# Altium PCB ACSR-RC-V2.0.PcbDoc (part 3 of 3)
Units mm, origin at the board's own origin, x right, y up, seen from the top; angles counter-clockwise.
Board outline 93 x 128 mm, 2 copper layers (Top Layer, Bottom Layer); 207 components, 178 nets, 884 pads, 664 vias.
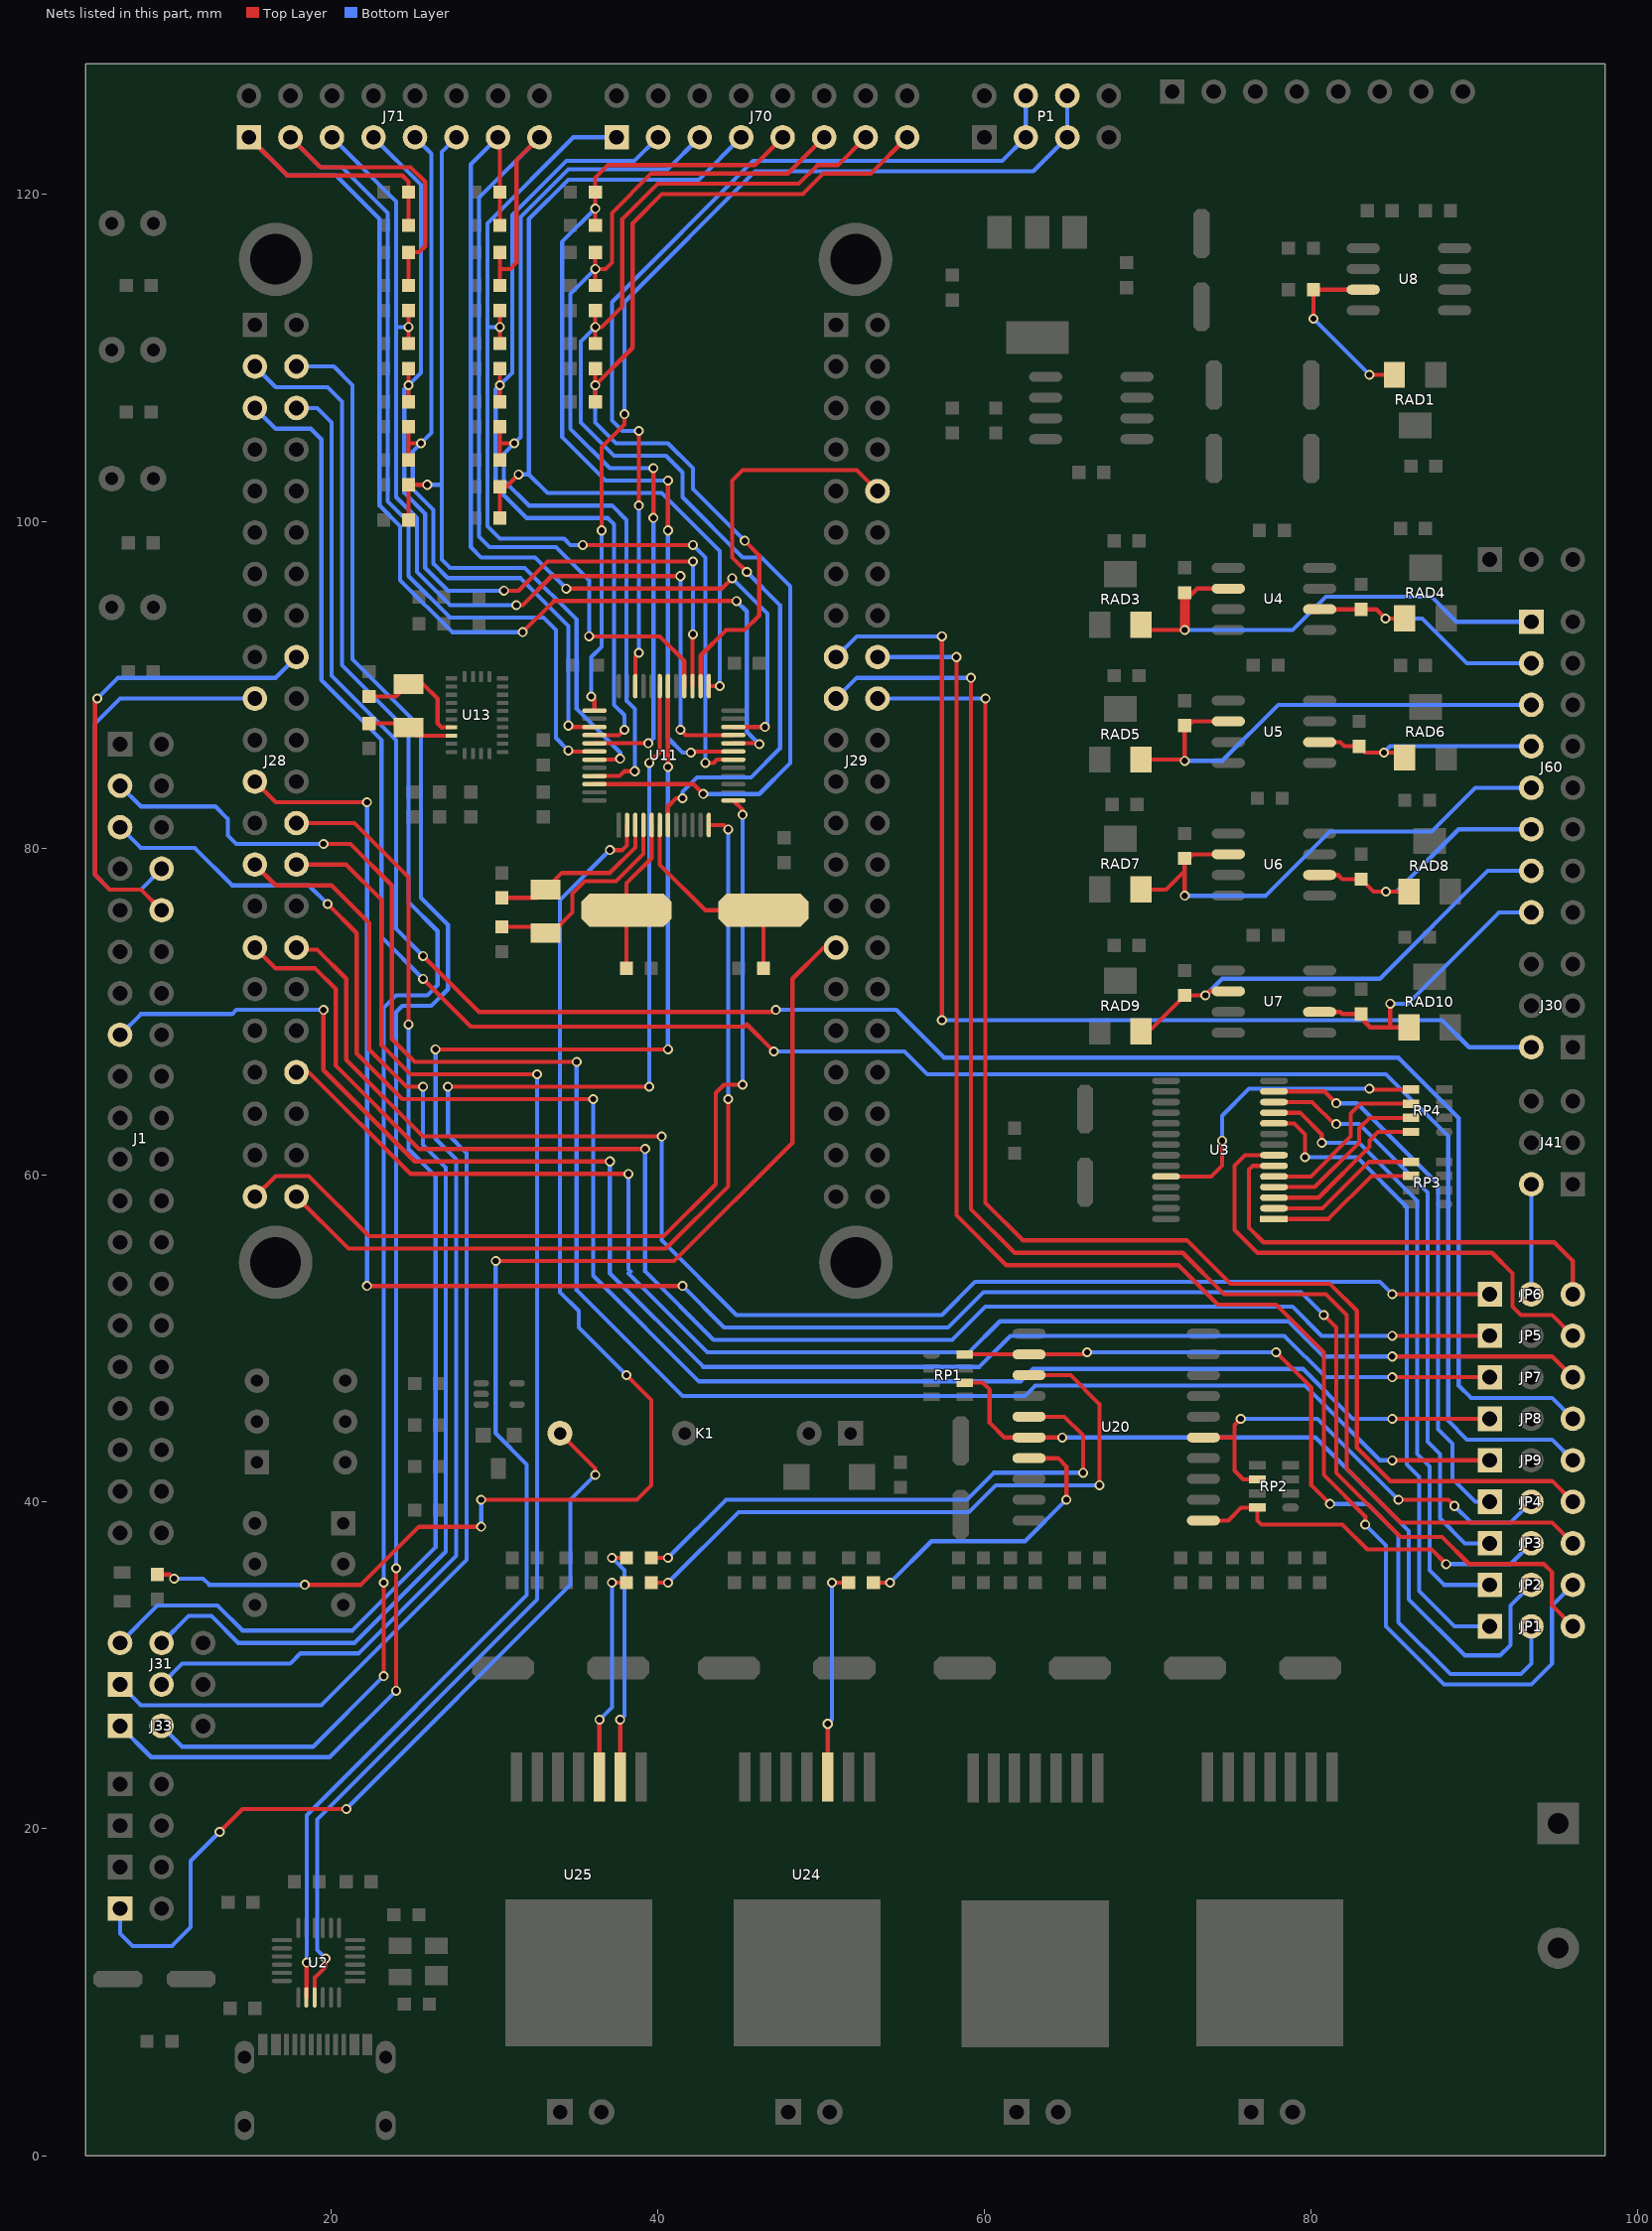
[diagram p3: the nets of this part, all layers, seen from the top]

## Via types
v1: diameter 0.61, hole 0.381, Top Layer to Bottom Layer, 661 vias
v2: diameter 0.762, hole 0.381, Top Layer to Bottom Layer, 3 vias

## Nets (pads, with @x,y where several pads share a name; then routed paths per layer and width w, separated by ;. In a path a pad name is that pad's centre, name@x,y a point inside that pad or via, vN(x,y) a via of type N, cw(c..) or ccw(c..) an arc to the next point about the centre after c; other vN are vias at no path point) (continued)
NetR62_1: R62.1 U20.7 | length 18.4
  Top Layer w0.254: R62.1@53.213,35.052 v1(54.229,35.052) ; U20.7@62.738,42.672 64.516,42.672 65.024,42.164 v1(65.024,40.132)
  Bottom Layer w0.254: v1(54.229,35.052) 56.769,37.592 62.484,37.592 v1(65.024,40.132)
NetR62_2: R62.2 U24.3 | length 13
  Top Layer w0.254: U24.3@50.419,23.176 v1(50.419,26.416) ; v1(50.673,35.052) R62.2@51.689,35.052
  Bottom Layer w0.254: v1(50.419,26.416) 50.673,26.67 v1(50.673,35.052)
NetR63_1: R63.1 U20.5 | length 34.6
  Top Layer w0.254: R63.1@39.624,36.576 v1(40.64,36.576) ; U20.5@62.738,45.212 64.897,45.212 66.04,44.069 v1(66.04,41.783)
  Bottom Layer w0.254: v1(40.64,36.576) 44.196,40.132 58.928,40.132 60.579,41.783 v1(66.04,41.783)
NetR63_2: R63.2 U25.2 | length 14.7
  Top Layer w0.254: v1(37.211,36.576) R63.2@38.1,36.576 ; U25.2@37.719,23.176 v1(37.719,26.67)
  Bottom Layer w0.254: v1(37.211,36.576) 37.973,35.814 37.973,26.924 v1(37.719,26.67)
NetR64_1: R64.1 U20.3 | length 39.9
  Top Layer w0.254: R64.1@39.624,35.052 v1(40.64,35.052) ; U20.3@62.738,47.752 65.278,47.752 67.056,45.974 v1(67.056,41.021)
  Bottom Layer w0.254: v1(40.64,35.052) 44.958,39.37 59.055,39.37 60.706,41.021 v1(67.056,41.021)
NetR64_2: R64.2 U25.3 | length 13.1
  Top Layer w0.254: U25.3@36.449,23.176 v1(36.449,26.67) ; v1(37.211,35.052) R64.2@38.1,35.052
  Bottom Layer w0.254: v1(36.449,26.67) 37.211,27.432 v1(37.211,35.052)
NetR66_2: R66.2 U11.2 | length 78.8
  Top Layer w0.254: R66.2@9.398,35.56 10.16,35.56 v1(10.414,35.306) ; v1(18.415,34.925) 21.844,34.925 25.4,38.481 v1(29.21,38.481) ; v1(29.21,40.132) 38.735,40.132 39.624,41.021 39.624,46.228 v1(38.1,47.752) ; v1(37.084,79.883) 37.846,79.883 38.14,80.177 U11.2@38.14,81.416
  Bottom Layer w0.254: v1(10.414,35.306) 12.192,35.306 12.573,34.925 v1(18.415,34.925) ; v1(29.21,38.481) v1(29.21,40.132) ; v1(37.084,79.883) 34.036,76.835 34.036,52.832 35.179,51.689 35.179,50.673 v1(38.1,47.752)
NetR69_1: R69.1 RAD1.3 U8.3 | length 11.2
  Top Layer w0.254: v1(80.137,112.395) R69.1@80.137,114.173 U8.3@83.185,114.173 ; v1(83.566,108.966) RAD1.3@85.09,108.966
  Bottom Layer w0.254: v1(80.137,112.395) v1(83.566,108.966)
NetRP3_5: RP3.5 U3.2 | length 9.6
  Top Layer w0.254: U3.2@77.724,57.964 80.697,57.964 83.541,60.808 RP3.5@86.106,60.808
NetRP3_6: RP3.6 U3.1 | length 9.5
  Top Layer w0.254: U3.1@77.724,57.314 81.063,57.314 83.693,59.944 RP3.6@86.106,59.944
NetRP4_5: RP4.5 U3.24 | length 19
  Top Layer w0.254: U3.24@71.12,59.914 73.884,59.914 74.549,60.579 v1(74.549,62.103) ; v1(83.566,65.278) 83.617,65.227 RP4.5@86.106,65.227
  Bottom Layer w0.254: v1(74.549,62.103) 74.549,63.627 76.2,65.278 v1(83.566,65.278)
NetRP4_6: RP4.6 U3.5 | length 11
  Top Layer w0.254: U3.5@77.724,59.914 79.98,59.914 82.423,62.357 82.423,63.754 83.033,64.364 RP4.6@86.106,64.364
NetRP4_7: RP4.7 U3.4 | length 10.7
  Top Layer w0.254: U3.4@77.724,59.264 80.219,59.264 82.931,61.976 82.931,62.865 83.566,63.5 RP4.7@86.106,63.5
NetRP4_8: RP4.8 U3.3 | length 10.3
  Top Layer w0.254: U3.3@77.724,58.614 80.458,58.614 83.566,61.722 83.566,62.103 84.099,62.636 RP4.8@86.106,62.636
NRST: J29.10 U11.7 | length 37
  Top Layer w0.254: U11.7@40.64,81.416 40.64,82.55 41.148,83.058 v1(41.529,83.058) ; v1(45.466,96.901) 44.577,97.79 44.577,102.489 45.212,103.124 52.197,103.124 J29.10@53.467,101.854
  Bottom Layer w0.254: v1(41.529,83.058) 41.529,83.439 42.418,84.328 45.72,84.328 47.498,86.106 47.498,94.869 v1(45.466,96.901)
NVIDIA_OE: J1.15 JP7.1 | length 101.5
  Top Layer w0.254: v1(19.558,70.104) 19.558,66.421 25.146,60.833 v1(37.084,60.833) ; v1(84.963,47.625) JP7.1@90.932,47.625
  Bottom Layer w0.254: J1.15@7.112,68.58 8.382,69.85 13.97,69.85 14.224,70.104 v1(19.558,70.104) ; v1(37.084,60.833) 37.084,53.975 42.799,48.26 59.69,48.26 61.595,50.165 78.359,50.165 80.899,47.625 v1(84.963,47.625)
NVIDIA_SCL: J1.5 JP8.1 | length 110.2
  Top Layer w0.254: v1(19.812,76.581) 21.59,74.803 21.59,67.437 24.384,64.643 v1(36.068,64.643) ; v1(84.963,45.085) 90.678,45.085 90.805,45.212 JP8.1@90.932,45.085
  Bottom Layer w0.254: J1.5@7.112,81.28 8.382,80.01 11.684,80.01 13.97,77.724 18.669,77.724 v1(19.812,76.581) ; v1(36.068,64.643) 36.068,53.848 42.545,47.371 62.23,47.371 62.992,48.133 79.502,48.133 82.55,45.085 v1(84.963,45.085)
NVIDIA_SDA: J1.3 JP9.1 | length 115.7
  Top Layer w0.254: v1(19.558,80.264) 21.209,80.264 23.749,77.724 23.749,68.326 25.146,66.929 v1(35.052,66.929) ; v1(84.963,42.545) JP9.1@90.932,42.545
  Bottom Layer w0.254: J1.3@7.112,83.82 8.382,82.55 12.954,82.55 13.716,81.788 13.716,80.772 14.224,80.264 v1(19.558,80.264) ; v1(35.052,66.929) 35.052,52.959 41.529,46.482 62.484,46.482 63.119,47.117 79.629,47.117 84.201,42.545 v1(84.963,42.545)
OSC32_IN: C59.1 U11.3 Y3.2 | length 10.8
  Top Layer w0.254: C59.1@30.48,76.962 32.639,76.962 Y3.2@33.147,77.47 34.163,78.486 37.084,78.486 38.64,80.042 U11.3@38.64,81.416
OSC32_OUT: C60.1 U11.4 Y3.1 | length 13.3
  Top Layer w0.254: C60.1@30.48,75.184 32.766,75.184 Y3.1@33.147,74.803 33.528,74.803 34.798,76.073 34.798,77.216 35.56,77.978 37.465,77.978 39.14,79.653 U11.4@39.14,81.416
OSC_IN: C57.1 U11.5 Y2.2 | length 9.4
  Top Layer w0.254: C57.1@38.1,72.644 Y2.2@38.1,76.2 38.1,77.851 39.64,79.391 U11.5@39.64,81.416
OSC_OUT: C58.1 U11.6 Y2.1 | length 13.5
  Top Layer w0.254: U11.6@40.132,81.416 40.132,78.994 42.926,76.2 Y2.1@46.482,76.2 C58.1@46.482,72.644
PB4/OE: J28.38 JP7.3 | length 91.1
  Top Layer w0.254: J28.38@17.907,66.294 18.669,66.294 24.892,60.071 v1(38.227,60.071) ; v1(84.963,48.895) 94.742,48.895 JP7.3@96.012,47.625
  Bottom Layer w0.254: v1(38.227,60.071) 38.227,54.229 38.354,54.102 38.227,53.975 43.053,49.149 59.055,49.149 60.96,51.054 78.613,51.054 80.772,48.895 v1(84.963,48.895)
PCA/ESC: JP5.3 U3.7 | length 31.2
  Top Layer w0.254: U3.7@77.724,61.214 75.946,61.214 75.311,60.579 75.311,56.642 76.708,55.245 91.059,55.245 92.329,53.975 92.329,51.943 92.837,51.435 94.742,51.435 JP5.3@96.012,50.165
PCA/PWM0: JP1.1 U3.10 | length 40.1
  Top Layer w0.254: U3.10@77.724,63.164 78.949,63.164 79.629,62.484 v1(79.629,61.087)
  Bottom Layer w0.254: v1(79.629,61.087) 82.804,61.087 85.852,58.039 85.852,42.291 86.614,41.529 86.614,34.544 88.773,32.385 JP1.1@90.932,32.385
PCA/PWM1: JP2.1 U3.11 | length 38.3
  Top Layer w0.254: U3.11@77.724,63.814 79.315,63.814 80.645,62.484 v1(80.645,61.976)
  Bottom Layer w0.254: v1(80.645,61.976) 82.931,61.976 86.487,58.42 86.487,42.926 87.249,42.164 87.249,35.814 88.138,34.925 JP2.1@90.932,34.925
PCA/PWM2: JP3.1 U3.12 | length 35.6
  Top Layer w0.254: U3.12@77.724,64.464 80.062,64.464 81.407,63.119 v1(81.534,63.119)
  Bottom Layer w0.254: v1(81.534,63.119) 82.931,63.119 87.122,58.928 87.122,43.688 87.884,42.926 87.884,38.989 89.408,37.465 JP3.1@90.932,37.465
PCA/PWM3: JP4.1 U3.13 | length 33.7
  Top Layer w0.254: U3.13@77.724,65.114 80.809,65.114 v1(81.534,64.389)
  Bottom Layer w0.254: v1(81.534,64.389) 82.804,64.389 87.757,59.436 87.757,44.45 88.646,43.561 88.646,41.402 90.043,40.005 JP4.1@90.932,40.005
PCA/SERVO: JP6.3 U3.6 | length 27.9
  Top Layer w0.254: U3.6@77.724,60.564 76.439,60.564 76.2,60.325 76.2,56.769 77.089,55.88 94.869,55.88 96.012,54.737 JP6.3@96.012,52.705
PWM0: JP1.2 RP1.8 U20.2 | length 52
  Top Layer w0.254: RP1.8@58.801,49.022 U20.2@62.738,49.022 66.167,49.022 v1(66.294,49.149) ; v1(77.851,49.149) 80.01,46.99 80.01,41.021 v1(81.153,39.878)
  Bottom Layer w0.254: v1(66.294,49.149) v1(77.851,49.149) ; v1(81.153,39.878) 83.439,39.878 85.344,37.973 85.344,32.639 88.519,29.464 92.837,29.464 93.472,30.099 JP1.2@93.472,32.385
PWM1: JP2.2 RP1.6 U20.6 | length 48.4
  Top Layer w0.254: RP1.6@58.801,47.295 59.893,47.295 60.325,46.863 60.325,44.831 61.214,43.942 U20.6@62.738,43.942 v1(64.77,43.942)
  Bottom Layer w0.254: v1(64.77,43.942) 80.264,43.942 85.979,38.227 85.979,34.036 89.408,30.607 91.567,30.607 92.202,31.242 92.202,33.655 JP2.2@93.472,34.925
PWM2: JP3.2 RP2.8 U20.11 | length 22.8
  Top Layer w0.254: U20.11@73.406,38.862 74.93,38.862 75.717,39.649 RP2.8@76.708,39.649 76.708,38.862 76.962,38.608 81.915,38.608 83.439,37.084 87.376,37.084 v1(88.265,36.195)
  Bottom Layer w0.254: v1(88.265,36.195) 92.202,36.195 JP3.2@93.472,37.465
PWM3: JP4.2 RP2.6 U20.15 | length 27.8
  Top Layer w0.254: U20.15@73.406,43.942 75.311,43.942 ; v1(75.692,45.085) 75.311,44.704 75.311,43.942 ; RP2.6@76.708,41.377 75.844,41.377 75.311,41.91 75.311,43.942 ; v1(85.344,40.132) 88.392,40.132 v1(88.773,39.751)
  Bottom Layer w0.254: v1(75.692,45.085) 80.391,45.085 v1(85.344,40.132) ; v1(88.773,39.751) 89.789,38.735 92.202,38.735 JP4.2@93.472,40.005
RECEIVER: J55.1 K1.4 | length 51.7
  Top Layer w0.254: v1(13.208,19.812) 14.605,21.209 v1(20.955,21.209) ; K1.4@34.036,44.196 36.195,42.037 v1(36.195,41.656)
  Bottom Layer w0.254: J55.1@7.112,15.113 7.112,13.589 7.874,12.827 10.287,12.827 11.43,13.97 11.43,18.034 v1(13.208,19.812) ; v1(20.955,21.209) 34.671,34.925 34.671,40.132 v1(36.195,41.656)
RX0: J28.26 J31.2 | length 72.9
  Top Layer w0.254: J28.26@17.907,81.534 21.463,81.534 24.765,78.232 v1(24.765,69.215)
  Bottom Layer w0.254: J31.2@7.112,31.369 9.398,33.655 13.081,33.655 14.605,32.131 21.336,32.131 26.416,37.211 26.416,59.944 24.765,61.595 v1(24.765,69.215)
RX1: J31.1 U11.31 | length 92
  Top Layer w0.254: v1(27.178,65.405) v1(39.497,65.405) ; v1(39.497,85.217) 40.14,85.86 U11.31@40.14,89.916
  Bottom Layer w0.254: J31.1@6.985,28.829 J31.1@7.048,28.765 ; J31.1@7.112,28.829 8.382,27.559 19.431,27.559 28.321,36.449 28.321,61.341 27.178,62.484 v1(27.178,65.405) ; v1(39.497,65.405) v1(39.497,85.217)
RX4: J1.8 J28.19 | length 24.6
  Bottom Layer w0.254: J1.8@9.652,78.74 8.382,77.47 6.477,77.47 5.588,78.359 5.588,87.63 7.112,89.154 J28.19@15.367,89.154
RX5: J28.44 U11.12 | length 52.4
  Top Layer w0.254: J28.44@17.907,58.674 21.082,55.499 40.513,55.499 44.323,59.309 v1(44.323,64.643) ; U11.12@43.14,81.416 44.06,81.416 v1(44.323,81.153)
  Bottom Layer w0.254: v1(44.323,64.643) v1(44.323,81.153)
RX7: J28.28 U2.21 | length 87.9
  Top Layer w0.254: J28.28@17.907,78.994 18.034,78.867 18.161,78.994 20.955,78.994 23.114,76.835 23.114,67.945 24.892,66.167 v1(32.639,66.167) ; U2.21@19.018,9.684 19.018,10.89 19.685,11.557 v1(19.685,12.065)
  Bottom Layer w0.254: v1(19.685,12.065) 19.177,12.573 19.177,20.574 32.639,34.036 v1(32.639,66.167)
RX8: J28.4 J33.1 | length 107.9
  Top Layer w0.254: v1(24.003,28.448) v1(24.003,35.941)
  Bottom Layer w0.254: J33.1@7.112,26.289 9.017,24.384 19.939,24.384 v1(24.003,28.448) ; J28.4@17.907,109.474 20.193,109.474 21.336,108.331 21.336,91.567 25.527,87.376 25.527,76.962 27.178,75.311 27.178,71.374 26.162,70.358 24.384,70.358 24.003,69.977 v1(24.003,35.941)
S00: C19.1 J70.1 R19.2 U11.18 | length 59.9
  Top Layer w0.254: C19.1@30.353,110.871 v1(30.353,111.887) R19.2@30.353,112.903 ; v1(35.433,98.552) v1(42.164,98.552) ; v1(42.926,85.217) 43.434,85.217 43.633,85.416 U11.18@44.64,85.416
  Bottom Layer w0.254: v1(30.353,111.887) 29.591,111.887 ; v1(35.433,98.552) 34.671,98.552 34.29,98.933 30.353,98.933 29.591,99.695 29.591,111.887 ; J70.1@37.5,123.5 34.854,123.5 29.591,118.237 29.591,111.887 ; v1(42.164,98.552) 42.926,97.79 v1(42.926,85.217)
S01: C20.1 J70.3 R20.2 U11.40 | length 53
  Top Layer w0.254: C20.1@30.353,107.315 v1(30.353,108.331) R20.2@30.353,109.347 ; U11.40@36.14,86.916 37.64,86.916 v1(37.973,87.249)
  Bottom Layer w0.254: v1(37.973,87.249) 37.973,88.138 37.338,88.773 37.338,99.822 36.957,100.203 32.004,100.203 30.099,102.108 30.099,108.077 v1(30.353,108.331) 31.115,109.093 31.115,118.745 34.417,122.047 38.587,122.047 J70.3@40.04,123.5
S02: C21.1 J70.5 R21.2 U11.45 | length 59.1
  Top Layer w0.254: C21.1@30.353,103.759 30.353,104.775 ; R21.2@30.353,105.791 30.353,104.775 ; v1(31.242,104.775) 30.353,104.775 ; U11.45@36.14,84.416 37.68,84.416 37.973,84.709 v1(38.608,84.709)
  Bottom Layer w0.254: v1(38.608,84.709) 38.608,88.519 38.1,89.027 38.1,100.076 37.211,100.965 32.131,100.965 30.607,102.489 30.607,104.14 v1(31.242,104.775) 31.623,105.156 31.623,118.618 34.544,121.539 40.619,121.539 J70.5@42.58,123.5
S03: C22.1 J70.7 R22.2 U11.25 | length 57.2
  Top Layer w0.254: C22.1@30.353,100.203 R22.2@30.353,102.108 30.734,102.108 v1(31.496,102.87) ; U11.25@43.14,89.916 v1(43.815,89.916)
  Bottom Layer w0.254: v1(31.496,102.87) 32.131,102.87 ; v1(43.815,89.916) 43.815,98.171 40.259,101.727 33.274,101.727 32.131,102.87 ; J70.7@45.12,123.5 42.524,120.904 34.544,120.904 32.131,118.491 32.131,102.87
S04: C23.1 J70.9 R23.2 U11.19 | length 57.9
  Top Layer w0.254: C23.1@36.195,118.11 v1(36.195,119.126) R23.2@36.195,120.142 36.195,121.031 36.957,121.793 45.953,121.793 J70.9@47.66,123.5 ; v1(40.64,99.441) v1(40.64,102.489) ; v1(42.037,85.852) 42.101,85.916 U11.19@44.64,85.916
  Bottom Layer w0.254: v1(36.195,119.126) 34.163,117.094 34.163,105.156 36.83,102.489 v1(40.64,102.489) ; v1(40.64,99.441) 40.64,86.741 41.529,85.852 v1(42.037,85.852)
S05: C24.1 J70.11 R24.2 U11.41 | length 57.9
  Top Layer w0.254: U11.41@36.14,86.416 v1(39.441,86.416) ; C24.1@36.195,114.427 v1(36.195,115.443) ; R24.2@36.195,116.459 v1(36.195,115.443) ; v1(39.751,100.203) v1(39.751,103.251) ; J70.11@50.2,123.5 47.985,121.285 39.624,121.285 37.211,118.872 37.211,115.824 36.83,115.443 v1(36.195,115.443)
  Bottom Layer w0.254: v1(36.195,115.443) 34.671,113.919 34.671,105.664 37.084,103.251 v1(39.751,103.251) ; v1(39.441,86.416) 39.751,86.726 v1(39.751,100.203)
S06: C25.1 J70.13 R25.2 U11.46 | length 74.4
  Top Layer w0.254: U11.46@36.14,83.916 42.195,83.916 v1(42.799,83.312) ; C25.1@36.195,110.871 v1(36.195,111.887) ; R25.2@36.195,112.903 v1(36.195,111.887) ; J70.13@52.74,123.5 51.033,121.793 49.784,121.793 48.641,120.65 40.005,120.65 37.846,118.491 37.846,113.157 36.576,111.887 v1(36.195,111.887)
  Bottom Layer w0.254: v1(36.195,111.887) 35.306,110.998 35.306,106.045 37.338,104.013 40.513,104.013 41.529,102.997 41.529,101.473 45.212,97.79 46.355,97.79 48.133,96.012 48.133,85.217 46.228,83.312 v1(42.799,83.312)
S07: C26.1 J70.15 R26.2 U11.26 | length 58.5
  Top Layer w0.254: C26.1@36.195,107.315 v1(36.195,108.331) ; R26.2@36.195,109.347 v1(36.195,108.331) ; U11.26@42.64,89.916 42.64,91.789 44.196,93.345 45.339,93.345 46.228,94.234 46.228,97.917 v1(45.339,98.806) ; J70.15@55.28,123.5 53.065,121.285 50.165,121.285 48.895,120.015 40.259,120.015 38.481,118.237 38.481,110.617 v1(36.195,108.331)
  Bottom Layer w0.254: v1(36.195,108.331) 36.195,106.045 37.465,104.775 40.64,104.775 42.164,103.251 42.164,101.981 v1(45.339,98.806)
S08: C27.1 J71.1 R27.2 U11.20 | length 79.9
  Top Layer w0.254: J71.1@15,123.5 17.342,121.158 24.384,121.158 24.765,120.777 R27.2@24.765,120.142 C27.1@24.765,118.11 ; v1(31.75,93.218) 33.655,95.123 v1(44.831,95.123) ; U11.20@44.64,86.416 46.172,86.416 v1(46.228,86.36)
  Bottom Layer w0.254: J71.1@15,123.5 17.342,121.158 20.32,121.158 22.987,118.491 22.987,100.965 24.257,99.695 24.257,96.393 27.432,93.218 v1(31.75,93.218) ; v1(44.831,95.123) 45.466,94.488 45.466,87.122 v1(46.228,86.36)
S09: C28.1 J71.3 R28.2 U11.42 | length 66.8
  Top Layer w0.254: J71.3@17.54,123.5 19.374,121.666 24.892,121.666 25.781,120.777 25.781,116.84 25.4,116.459 R28.2@24.765,116.459 C28.1@24.765,114.427 ; v1(34.544,85.979) 34.607,85.916 U11.42@36.14,85.916
  Bottom Layer w0.254: J71.3@17.54,123.5 19.374,121.666 20.701,121.666 23.495,118.872 23.495,101.219 24.765,99.949 24.765,96.647 27.305,94.107 33.02,94.107 33.782,93.345 33.782,86.741 v1(34.544,85.979)
S10: C29.1 J71.5 R29.2 U11.21 | length 62
  Top Layer w0.254: C29.1@24.765,110.871 v1(24.765,111.887) R29.2@24.765,112.903 ; v1(31.369,94.869) 31.75,94.869 33.528,96.647 v1(41.402,96.647) ; v1(41.402,87.249) 41.735,86.916 U11.21@44.64,86.916
  Bottom Layer w0.254: J71.5@20.08,123.5 24.003,119.577 24.003,111.887 ; v1(24.765,111.887) 24.003,111.887 ; v1(31.369,94.869) 27.305,94.869 25.273,96.901 25.273,100.203 24.003,101.473 24.003,111.887 ; v1(41.402,87.249) v1(41.402,96.647)
S11: C30.1 J71.7 R30.2 U11.27 | length 55.9
  Top Layer w0.254: C30.1@24.765,107.315 v1(24.765,108.331) R30.2@24.765,109.347 ; v1(30.607,95.758) 31.496,95.758 33.274,97.536 v1(42.164,97.536) ; U11.27@42.14,89.916 42.14,93.067 v1(42.164,93.091)
  Bottom Layer w0.254: J71.7@22.62,123.5 25.527,120.593 25.527,109.093 v1(24.765,108.331) 24.511,108.077 24.511,101.727 25.781,100.457 25.781,97.155 27.178,95.758 v1(30.607,95.758) ; v1(42.164,93.091) v1(42.164,97.536)
S12: C31.1 J71.9 R31.2 U11.39 | length 47.9
  Top Layer w0.254: C31.1@24.765,103.759 24.765,104.775 ; R31.2@24.765,105.791 24.765,104.775 ; v1(25.527,104.775) 24.765,104.775 ; v1(34.544,87.503) 34.631,87.416 U11.39@36.14,87.416
  Bottom Layer w0.254: J71.9@25.16,123.5 26.162,122.498 26.162,105.41 v1(25.527,104.775) 25.019,104.267 25.019,101.981 26.289,100.711 26.289,97.409 27.178,96.52 31.623,96.52 34.544,93.599 v1(34.544,87.503)
S13: C32.1 J71.11 R32.2 U11.43 | length 51.4
  Top Layer w0.254: C32.1@24.765,100.076 R32.2@24.765,102.235 v1(25.908,102.235) ; U11.43@36.14,85.416 37.664,85.416 v1(37.719,85.471)
  Bottom Layer w0.254: v1(25.908,102.235) 26.797,102.235 ; J71.11@27.7,123.5 26.797,122.597 26.797,102.235 ; v1(37.719,85.471) 37.719,85.852 35.052,88.519 35.052,93.98 31.877,97.155 27.305,97.155 26.797,97.663 26.797,102.235
S14: C33.1 J71.13 R33.2 U11.22 | length 60.5
  Top Layer w0.254: J71.13@30.24,123.5 30.353,123.387 R33.2@30.353,120.142 C33.1@30.353,118.11 ; v1(34.417,95.885) 43.942,95.885 v1(44.577,96.52) ; U11.22@44.64,87.416 v1(46.569,87.416)
  Bottom Layer w0.254: J71.13@30.24,123.5 28.575,121.835 28.575,98.425 29.21,97.79 32.512,97.79 v1(34.417,95.885) ; v1(44.577,96.52) 46.736,94.361 46.736,87.583 v1(46.569,87.416)
S15: C34.1 J71.15 R34.2 U11.28 | length 56.7
  Top Layer w0.254: C34.1@30.353,114.427 30.353,115.443 ; R34.2@30.353,116.459 30.353,115.443 ; J71.15@32.78,123.5 31.369,122.089 31.369,115.824 30.988,115.443 30.353,115.443 ; v1(35.814,92.964) 40.132,92.964 41.64,91.456 U11.28@41.64,89.916
  Bottom Layer w0.254: J71.15@32.78,123.5 29.083,119.803 29.083,99.06 29.718,98.425 33.782,98.425 35.814,96.393 v1(35.814,92.964)
SERVO_INPUT: J29.17 J30.2 | length 67.2
  Top Layer w0.254: v1(57.404,69.469) v1(57.404,92.964)
  Bottom Layer w0.254: J29.17@50.927,91.694 52.197,92.964 v1(57.404,92.964) ; v1(57.404,69.469) 88.011,69.469 89.662,67.818 J30.2@93.472,67.818
SERVO_OUTPUT: J41.2 JP6.2 | length 6.7
  Bottom Layer w0.254: JP6.2@93.472,52.705 J41.2@93.472,59.436
STM32_ESC: J28.31 JP5.1 | length 94.2
  Top Layer w0.254: J28.31@15.367,73.914 16.637,72.644 19.05,72.644 20.32,71.374 20.32,66.675 25.4,61.595 v1(39.243,61.595) ; v1(84.963,50.165) JP5.1@90.932,50.165
  Bottom Layer w0.254: v1(39.243,61.595) 39.243,54.102 43.434,49.911 58.039,49.911 60.071,51.943 78.867,51.943 80.645,50.165 v1(84.963,50.165)
STM32_PWM0: J28.23 JP1.3 | length 127.6
  Top Layer w0.254: J28.23@15.367,84.074 16.637,82.804 v1(22.225,82.804) ; v1(22.225,53.213) v1(41.529,53.213) ; v1(80.772,51.435) 81.534,50.673 81.534,41.783 85.471,37.846 88.011,37.846 89.662,36.195 94.234,36.195 94.742,35.687 94.742,33.655 JP1.3@96.012,32.385
  Bottom Layer w0.254: v1(22.225,53.213) v1(22.225,82.804) ; v1(41.529,53.213) 44.069,50.673 57.785,50.673 59.944,52.832 79.375,52.832 v1(80.772,51.435)
STM32_PWM1: J29.18 JP2.3 | length 100.8
  Top Layer w0.254: v1(58.293,91.694) 58.293,57.531 61.341,54.483 71.882,54.483 74.295,52.07 77.851,52.07 80.772,49.149 80.772,41.656 83.312,39.116 v1(83.312,38.608)
  Bottom Layer w0.254: J29.18@53.467,91.694 v1(58.293,91.694) ; v1(83.312,38.608) 84.582,37.338 84.582,32.385 88.138,28.829 93.472,28.829 94.742,30.099 94.742,33.655 JP2.3@96.012,34.925
STM32_PWM2: J29.19 JP3.3 | length 92.1
  Top Layer w0.254: v1(59.182,90.424) 59.182,57.912 61.849,55.245 72.136,55.245 74.676,52.705 80.899,52.705 82.169,51.435 82.169,42.037 85.471,38.735 94.742,38.735 JP3.3@96.012,37.465
  Bottom Layer w0.254: J29.19@50.927,89.154 52.197,90.424 v1(59.182,90.424)
STM32_PWM3: J29.20 JP4.3 | length 85.9
  Top Layer w0.254: v1(60.071,89.154) 60.071,58.293 62.357,56.007 72.39,56.007 75.057,53.34 81.153,53.34 82.804,51.689 82.804,43.307 84.836,41.275 94.742,41.275 JP4.3@96.012,40.005
  Bottom Layer w0.254: J29.20@53.467,89.154 v1(60.071,89.154)
STM32_SCL: J28.6 JP8.3 | length 129.4
  Top Layer w0.254: v1(25.654,73.406) 29.083,69.977 v1@47.117,69.977 ; v1@47.244,69.977 v1@47.117,69.977 ; v1(47.244,70.104) v1@47.117,69.977
  Bottom Layer w0.254: J28.6@17.907,106.934 19.177,106.934 20.066,106.045 20.066,90.551 24.003,86.614 24.003,75.057 v1(25.654,73.406) ; v1(47.244,70.104) 54.61,70.104 57.531,67.183 85.344,67.183 89.027,63.5 89.027,47.117 89.789,46.355 94.742,46.355 JP8.3@96.012,45.085
STM32_SDA: J28.5 JP9.3 | length 133.3
  Top Layer w0.254: v1(25.654,72.009) 28.575,69.088 45.339,69.088 45.466,69.215 v1(47.117,67.564)
  Bottom Layer w0.254: J28.5@15.367,106.934 16.637,105.664 18.796,105.664 19.431,105.029 19.431,90.297 23.114,86.614 23.114,74.549 v1(25.654,72.009) ; v1(47.117,67.564) 55.118,67.564 56.515,66.167 84.582,66.167 88.392,62.357 88.392,44.958 89.535,43.815 94.742,43.815 JP9.3@96.012,42.545
STM32_SERVO: J28.32 JP6.1 | length 90.3
  Top Layer w0.254: J28.32@17.907,73.914 18.161,73.66 18.288,73.787 19.177,73.787 20.955,72.009 20.955,67.056 25.654,62.357 v1(40.259,62.357) ; v1(84.963,52.705) 90.678,52.705 90.805,52.832 JP6.1@90.932,52.705
  Bottom Layer w0.254: v1(40.259,62.357) 40.259,56.007 44.831,51.435 57.404,51.435 59.436,53.467 84.201,53.467 v1(84.963,52.705)
SWCLK_F103: P1.5 P1.6 U11.37 | length 59.7
  Top Layer w0.254: v1(35.941,89.281) 36.14,89.082 U11.37@36.14,88.416 ; v1(36.576,99.441) 36.576,104.521 37.973,105.918 v1(37.973,106.553)
  Bottom Layer w0.254: v1(35.941,89.281) 35.941,91.694 36.576,92.329 v1(36.576,99.441) ; v1(37.973,106.553) 37.973,113.411 45.974,121.412 62.992,121.412 P1.5@65.08,123.5 P1.6@65.08,126.04
SWDIO_F103: P1.3 P1.4 U11.34 | length 57.1
  Top Layer w0.254: U11.34@38.64,89.916 38.64,91.726 v1(38.862,91.948) ; v1(38.862,100.965) 38.862,105.283 38.735,105.41 v1(38.862,105.537)
  Bottom Layer w0.254: v1(38.862,91.948) 38.735,92.075 38.862,92.202 v1(38.862,100.965) ; v1(38.862,105.537) 37.846,105.537 37.211,106.172 37.211,113.411 45.847,122.047 61.087,122.047 P1.3@62.54,123.5 P1.4@62.54,126.04
TX0: J28.27 J31.4 | length 70.7
  Top Layer w0.254: J28.27@15.367,78.994 16.637,77.724 20.066,77.724 22.352,75.438 22.352,67.691 24.638,65.405 v1(25.654,65.405)
  Bottom Layer w0.254: J31.4@9.525,31.369 J31.4@9.588,31.432 ; J31.4@9.652,31.369 11.303,33.02 12.7,33.02 14.351,31.369 21.463,31.369 27.051,36.957 27.051,60.452 25.654,61.849 v1(25.654,65.405)
TX1: J31.3 U11.30 | length 89.3
  Top Layer w0.254: v1(26.416,67.691) v1(40.64,67.691) ; v1(40.64,84.963) U11.30@40.64,89.916
  Bottom Layer w0.254: J31.3@9.525,28.829 J31.3@9.588,28.892 ; J31.3@9.652,28.829 10.922,30.099 17.526,30.099 18.161,30.734 21.717,30.734 27.686,36.703 27.686,60.96 26.416,62.23 v1(26.416,67.691) ; v1(40.64,67.691) v1(40.64,84.963)
TX4: J1.10 J28.18 | length 29
  Top Layer w0.254: v1(5.715,89.154) 5.588,89.027 5.588,78.359 6.477,77.47 8.382,77.47 J1.10@9.652,76.2
  Bottom Layer w0.254: v1(5.715,89.154) 6.985,90.424 16.637,90.424 J28.18@17.907,91.694
TX5: J28.43 U11.13 | length 56.6
  Top Layer w0.254: J28.43@15.367,58.674 16.637,59.944 18.669,59.944 22.352,56.261 40.386,56.261 43.561,59.436 43.561,65.024 44.069,65.532 v1(45.212,65.532) ; U11.13@44.64,82.916 45.212,82.344 v1(45.212,82.042)
  Bottom Layer w0.254: v1(45.212,65.532) v1(45.212,82.042)
TX7: J29.31 U2.20 | length 86.1
  Top Layer w0.254: U2.20@18.518,9.684 18.518,11.787 v1(18.542,11.811) ; v1(30.099,54.737) 41.021,54.737 48.26,61.976 48.26,72.009 50.165,73.914 J29.31@50.927,73.914
  Bottom Layer w0.254: v1(18.542,11.811) 18.542,20.828 32.004,34.29 32.004,42.291 30.099,44.196 v1(30.099,54.737)
TX8: J28.3 J33.2 | length 105.1
  Top Layer w0.254: v1(23.241,29.337) v1(23.241,35.052)
  Bottom Layer w0.254: J33.2@9.525,26.289 J33.2@9.588,26.226 ; J33.2@9.652,26.289 10.922,25.019 18.923,25.019 v1(23.241,29.337) ; J28.3@15.367,109.474 16.637,108.204 19.812,108.204 20.701,107.315 20.701,91.186 24.765,87.122 24.765,76.708 26.543,74.93 26.543,71.628 25.908,70.993 24.003,70.993 23.241,70.231 v1(23.241,35.052)
VRS_0: C11.2 J60.1 RAD3.3 U4.2 | length 30.1
  Top Layer w0.254: RAD3.3@69.925,93.345 v1(72.263,93.345) ; 72.263,95.123 73.025,95.885 U4.2@74.295,95.885
  Top Layer w0.61: RAD3.3@69.596,93.674 RAD3.3@69.925,93.345 ; v1(72.263,93.345) 72.263,95.123 C11.2@72.263,95.631
  Bottom Layer w0.254: v1(72.263,93.345) 78.867,93.345 80.899,95.377 87.376,95.377 88.9,93.853 J60.1@93.472,93.853
VRS_1: C12.2 J60.3 RAD4.1 U4.6 | length 16.4
  Top Layer w0.254: U4.6@80.518,94.615 C12.2@83.058,94.615 83.985,94.615 v1(84.544,94.055) RAD4.1@85.725,94.055
  Top Layer w0.61: U4.6@79.883,94.615 U4.6@80.518,94.615 ; RAD4.1@85.725,94.055 RAD4.1@85.979,94.055
  Bottom Layer w0.254: v1(84.544,94.055) 86.793,94.055 89.535,91.313 J60.3@93.472,91.313
VRS_2: C13.2 J60.5 RAD5.3 U5.2 | length 30
  Top Layer w0.254: RAD5.3@69.596,85.419 72.188,85.419 v1(72.263,85.344) 72.263,87.249 72.771,87.757 U5.2@74.803,87.757
  Bottom Layer w0.254: v1(72.263,85.344) 74.549,85.344 77.978,88.773 J60.5@93.472,88.773
VRS_3: C14.2 J60.7 RAD6.1 U5.6 | length 14.8
  Top Layer w0.254: U5.6@80.518,86.487 81.788,86.487 82.042,86.233 C14.2@82.931,86.233 83.312,85.852 v1(84.455,85.852) 85.419,85.852 RAD6.1@85.725,85.546
  Bottom Layer w0.254: v1(84.455,85.852) 84.836,86.233 J60.7@93.472,86.233
VRS_4: C15.2 J60.9 RAD7.3 U6.2 | length 32
  Top Layer w0.254: RAD7.3@69.596,77.47 71.12,77.47 72.263,78.613 ; v1(72.263,77.089) 72.263,78.613 ; U6.2@74.93,79.629 72.771,79.629 72.263,79.121 72.263,78.613
  Bottom Layer w0.254: v1(72.263,77.089) 77.216,77.089 81.153,81.026 87.376,81.026 90.043,83.693 J60.9@93.472,83.693
VRS_5: C16.2 J60.11 RAD8.1 U6.6 | length 17
  Top Layer w0.254: U6.6@80.518,78.359 81.661,78.359 81.915,78.105 C16.2@83.058,78.105 83.82,77.343 v1(84.582,77.343) RAD8.1@85.979,77.343
  Top Layer w0.61: U6.6@79.883,78.359 U6.6@80.518,78.359
  Bottom Layer w0.254: v1(84.582,77.343) 85.217,77.343 89.027,81.153 J60.11@93.472,81.153
VRS_6: C17.2 J60.13 RAD9.3 U7.2 | length 29.5
  Top Layer w0.254: RAD9.3@69.596,68.782 70.052,68.782 C17.2@72.263,70.993 v1(73.533,70.993) 73.787,71.247 U7.2@74.93,71.247
  Bottom Layer w0.254: v1(73.533,70.993) 74.549,72.009 84.201,72.009 90.805,78.613 J60.13@93.472,78.613
VRS_7: C18.2 J60.15 RAD10.1 U7.6 | length 18.5
  Top Layer w0.254: U7.6@80.645,69.85 U7.6@80.518,69.977 81.788,69.977 81.915,69.85 C18.2@83.058,69.85 ; C18.2@82.931,69.723 83.618,69.036 84.798,69.036 ; v1(84.836,70.485) 84.836,69.074 84.798,69.036 ; RAD10.1@85.979,69.036 84.798,69.036
  Bottom Layer w0.254: v1(84.836,70.485) 85.904,70.485 91.492,76.073 J60.15@93.472,76.073
X1: C55.1 U13.27 Y1.2 | length 5.3
  Top Layer w0.254: C55.1@22.352,87.63 24.511,87.63 Y1.2@24.765,87.376 25.253,86.888 U13.27@27.394,86.888
X2: C56.1 U13.26 Y1.1 | length 7.4
  Top Layer w0.254: C56.1@22.352,89.281 24.003,89.281 Y1.1@24.765,90.043 25.654,90.043 26.543,89.154 26.543,87.63 26.797,87.376 26.809,87.388 U13.26@27.394,87.388
pads on no net: J1.7 J1.11 J1.12 J1.13 J1.16 J1.18 J1.19 J1.21 J1.22 J1.23 J1.24 J1.26 J1.27 J1.28 J1.29 J1.31 J1.32 J1.33 J1.35 J1.36 J1.37 J1.38 J1.40 J28.8 J28.10 J28.11 J28.12 J28.15 J28.17 J28.20 J28.21 J28.22 J28.24 J28.25 J28.29 J28.30 J28.33 J28.34 J28.35 J28.36 J28.37 J29.2 J29.3 J29.4 J29.5 J29.7 J29.8 J29.9 J29.13 J29.14 J29.22 J29.24 J29.29 J29.33 J29.34 J29.35 J29.36 J29.37 J29.38 RP3.2 RP3.7 SW1.3 SW1.4 SW2.3 SW2.4 U1.4 U2.1 U2.10 U2.11 U2.12 U2.13 U2.14 U2.15 U2.16 U2.17 U2.18 U2.19 U2.22 U2.23 U2.24 U3.8 U3.9 U3.15 U3.16 U3.17 U3.18 U3.19 U3.20 U3.21 U3.22 U8.5 U8.6 U8.7 U11.1 U11.29 U11.32 U11.33 U11.38 U13.1 U13.7 U13.8 U13.12 U13.13 U13.15 U13.16 U13.18 U13.21 U13.22 U13.23 U13.24 U14.A8 U14.B8

## Polygon pours and split planes (outlines as drawn)
GND on Bottom Layer "Top Layer-No Net" (solid, pour order 14): 91.44,15.621 97.028,15.621 97.028,8.255 90.805,8.255 90.805,0.635 29.21,0.635 29.21,5.715 83.82,5.715 83.82,15.621 91.44,15.621
+24V on Bottom Layer "Top Layer-No Net" (solid, pour order 2): 31.75,24.765 29.21,24.765 29.21,18.415 97.155,18.415 97.155,22.86 85.09,22.86 83.185,20.955 31.877,20.955 31.75,20.828 31.75,24.765
GND on Bottom Layer "Top Layer-No Net" (solid, pour order 22): 5.715,120.015 5.715,7.62 13.843,7.62 13.843,3.048 24.257,3.048 26.67,3.048 26.67,7.62 27.94,7.62 27.94,8.128 27.94,12.446 27.94,25.527 27.94,28.575 27.94,34.925 89.535,34.925 89.535,27.94 89.662,27.813 94.615,27.813 97.536,27.813 97.536,120.65 90.932,120.65 90.932,121.031 90.932,122.555 90.932,127.635 82.296,127.635 13.335,127.635 13.335,121.539 11.811,120.015
GND on Top Layer "Top Layer-No Net" (solid, pour order 18): 35.56,33.782 35.56,28.829 39.751,28.829 40.386,28.829 40.386,31.115 49.276,31.115 49.276,28.575 55.88,28.575 55.88,31.115 62.865,31.115 62.865,28.575 69.85,28.575 69.85,31.115 77.47,31.115 77.47,28.575 84.455,28.575 84.455,34.036 35.56,34.036 35.56,33.782
GND on Top Layer "Top Layer-No Net" (solid, pour order 12): 91.44,15.621 97.028,15.621 97.028,8.255 90.805,8.255 90.805,0.635 29.21,0.635 29.21,5.715 83.82,5.715 83.82,15.621 91.44,15.621
GND on Top Layer "Top Layer-No Net" (solid, pour order 26): 5.715,120.015 5.715,7.62 13.843,7.62 13.843,3.048 24.257,3.048 26.67,3.048 26.67,7.62 27.94,7.62 27.94,8.128 27.94,12.446 27.94,25.527 27.94,28.575 27.94,34.925 89.535,34.925 89.535,27.94 89.662,27.813 94.615,27.813 97.536,27.813 97.536,120.65 90.932,120.65 90.932,121.031 90.932,122.555 90.932,127.635 82.296,127.635 13.335,127.635 13.335,121.539 11.811,120.015

## Keep-outs
Keep-Out Layer:
  circle w0.254: c8,3 r1.5
  circle w0.254: c95,3 r1.5
  circle w0.254: c95,125 r1.5
  circle w0.254: c8,125 r1.5
  circle w0.127: c21.948,5.524 r0.381
  circle w0.127: c16.152,5.524 r0.381
  lines w0.254: 5,0 98,0 98,128 5,128 5,0

## Other copper
Top Layer:
  rectangle net +24V: 67.564,18.415 73.914,20.955
  rectangle net +24V: 71.12,19.431 73.914,30.48
  rectangle net +24V: 53.467,18.415 59.69,20.955
  rectangle net +24V: 57.023,18.415 59.69,30.099
  rectangle net +24V: 39.37,18.415 45.72,20.955
  rectangle net +24V: 41.783,18.415 45.72,30.607
  rectangle net +24V: 29.21,18.415 31.75,29.972
  rectangle net GND: 83.693,10.922 89.027,34.036
Bottom Layer:
  rectangle net +24V: 29.21,24.13 31.75,25.019

## Silkscreen, mask and mechanical layers (free items; w line width, h text height)
Top Overlay:
  circle w0.254: c8,3 r3
  circle w0.254: c95,3 r3
  circle w0.254: c95,125 r3
  circle w0.254: c8,125 r3
  lines w0.254: 14.097,57.404 14.097,54.654 ccw(c16.742,54.549) 16.637,51.904 19.177,51.904 49.657,51.904 52.197,51.904 ccw(c52.092,54.549) 54.737,54.654 54.737,57.404 ; 14.097,113.284 14.097,116.034 cw(c16.742,116.139) 16.637,118.784 ; 16.561,118.784 19.101,118.784 ; 19.177,118.784 49.657,118.784 52.197,118.784 cw(c52.092,116.139) 54.737,116.034 54.737,113.284
  text "ACSR-RC-V2.0" at 93.472,110.109 h0.76 r90
  text "2023-12-11" at 95.377,109.982 h0.76 r90

## Text inside footprints (layer, text, board x,y; h text height)
C2: Top Overlay "+" at 75.056,113.57 h1.2 r90
C4: Top Overlay "+" at 75.818,104.299 h1.2 r90
C6: Top Overlay "+" at 81.787,104.299 h1.2 r90
C36: Top Overlay "+" at 73.538,27.027 h2
C37: Top Overlay "+" at 59.441,27.027 h2
C38: Top Overlay "+" at 45.025,27.027 h2
C39: Top Overlay "+" at 31.182,27.027 h2
C40: Top Overlay "+" at 7.43,9.018 h1.2
C43: Top Overlay "+" at 67.944,60.008 h1.2 r90
C45: Top Overlay "+" at 56.77,43.275 h1.2 r270
J1: Top Overlay "1" at 6.604,88.138 h0.61 r270; Top Overlay "2" at 9.271,88.265 h0.61 r270; Top Overlay "40" at 10.287,35.941 h0.61; Top Overlay "39" at 5.334,35.941 h0.61
J28: Top Overlay "2" at 17.907,114.046 h0.61 r270; Top Overlay "1" at 14.859,113.792 h0.61 r270; Top Overlay "44" at 18.415,57.15 h0.61 r270; Top Overlay "43" at 14.478,57.15 h0.61 r270
J29: Top Overlay "2" at 53.34,114.046 h0.61 r270; Top Overlay "1" at 50.419,113.792 h0.61 r270; Top Overlay "44" at 53.975,57.15 h0.61 r270; Top Overlay "43" at 49.657,57.15 h0.61 r270
J30: Top Overlay "6" at 93.599,74.295 h0.61 r90; Top Overlay "5" at 96.266,74.295 h0.61 r90; Top Overlay "2" at 91.948,67.691 h0.61 r90; Top Overlay "1" at 98.171,67.818 h0.61 r90
J31: Top Overlay "6" at 13.716,30.861 h0.61; Top Overlay "5" at 13.716,28.321 h0.61; Top Overlay "2" at 6.604,32.893 h0.61 r90; Top Overlay "1" at 6.858,27.686 h0.61 r90
J41: Top Overlay "6" at 93.599,65.913 h0.61 r90; Top Overlay "5" at 96.266,65.913 h0.61 r90; Top Overlay "2" at 93.726,57.404 h0.61 r90; Top Overlay "1" at 96.266,57.658 h0.61 r90
J60: Top Overlay "2" at 95.631,95.758 h0.61 r270; Top Overlay "1" at 92.964,95.631 h0.61 r270; Top Overlay "15" at 91.44,75.946 h0.61 r270; Top Overlay "16" at 97.536,75.946 h0.61 r270
J70: Top Overlay "2" at 35.941,125.857 h0.61 r90; Top Overlay "1" at 35.941,123.317 h0.61 r90; Top Overlay "15" at 57.404,123.317 h0.61 r90; Top Overlay "16" at 57.404,125.476 h0.61 r90
J71: Top Overlay "2" at 13.335,125.73 h0.61 r90; Top Overlay "1" at 13.335,123.317 h0.61 r90; Top Overlay "15" at 34.925,123.19 h0.61 r90; Top Overlay "16" at 34.925,125.603 h0.61 r90
P1: Top Overlay "2" at 58.42,125.73 h0.61 r90; Top Overlay "1" at 58.42,123.317 h0.61 r90; Top Overlay "7" at 69.723,123.444 h0.61 r90; Top Overlay "8" at 69.723,125.857 h0.61 r90